# Altium PCB simplemesh.PcbDoc
Units mm, origin at the board's own origin, x right, y up, seen from the top; angles counter-clockwise.
Board outline 89.28 x 57.53 mm, 2 copper layers (Top Layer, Bottom Layer); 6 components, 0 nets, 61 pads, 0 vias.
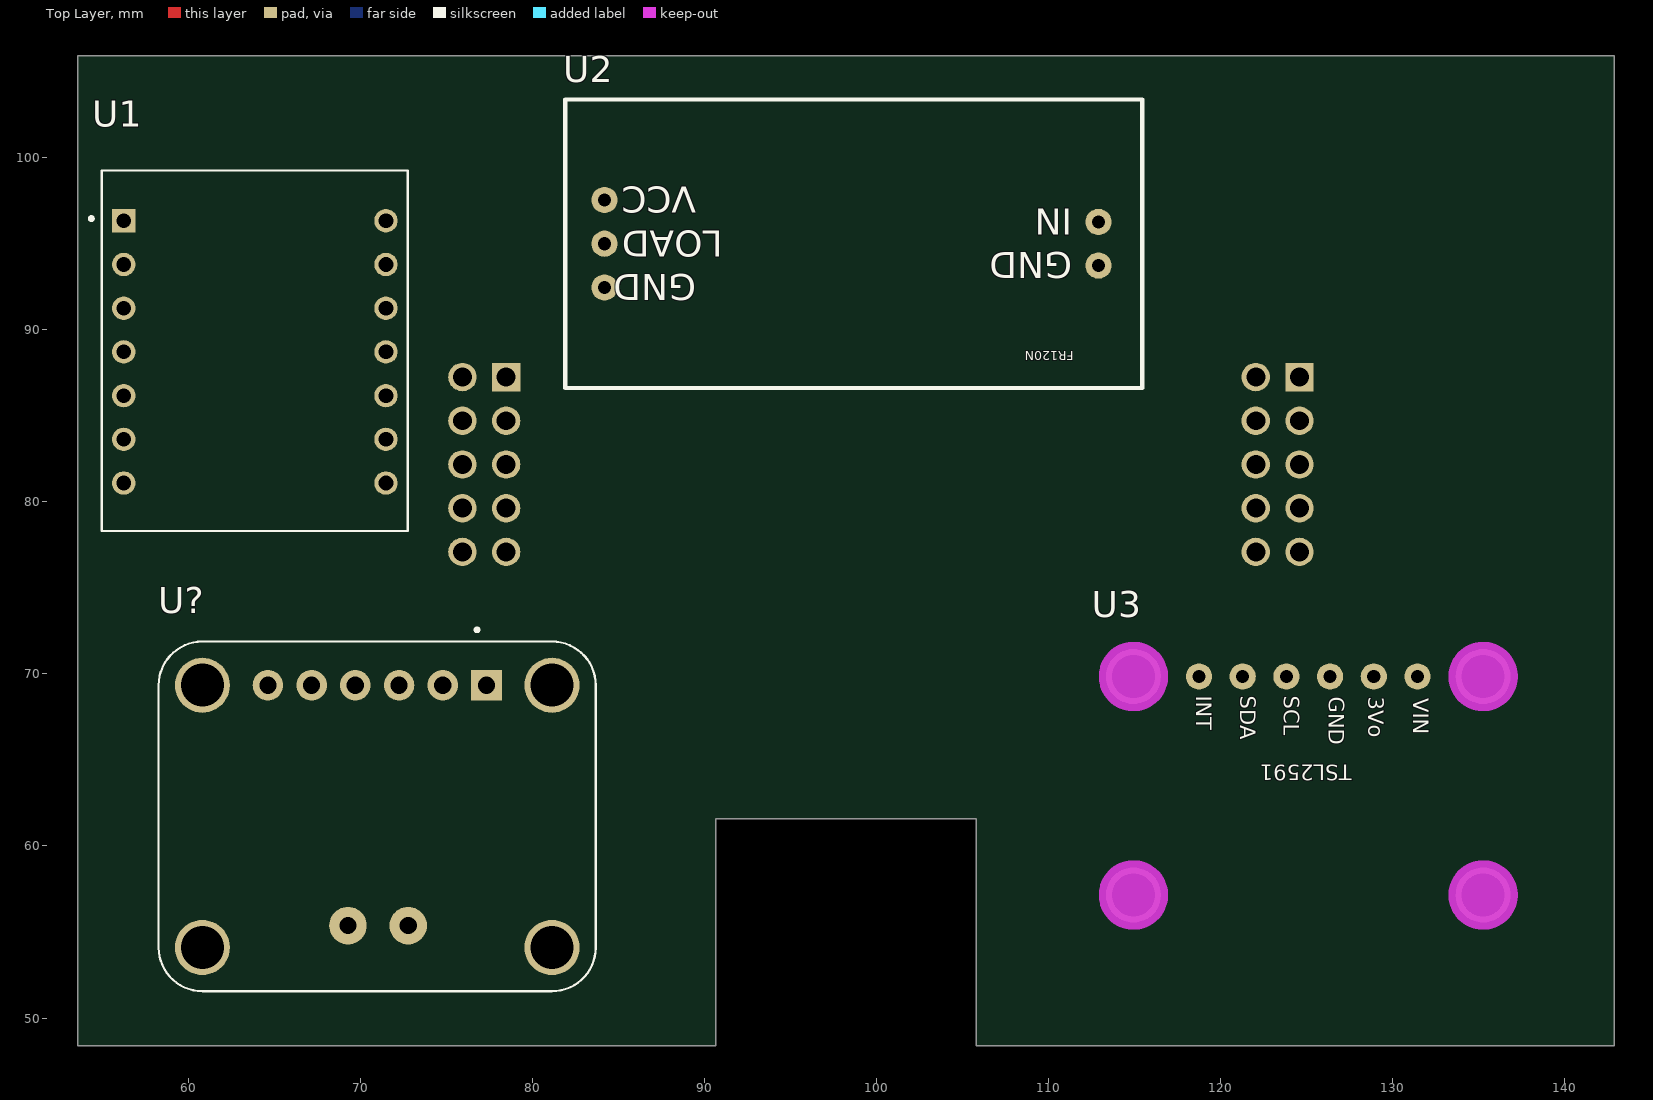
[diagram p0: Top Layer view]
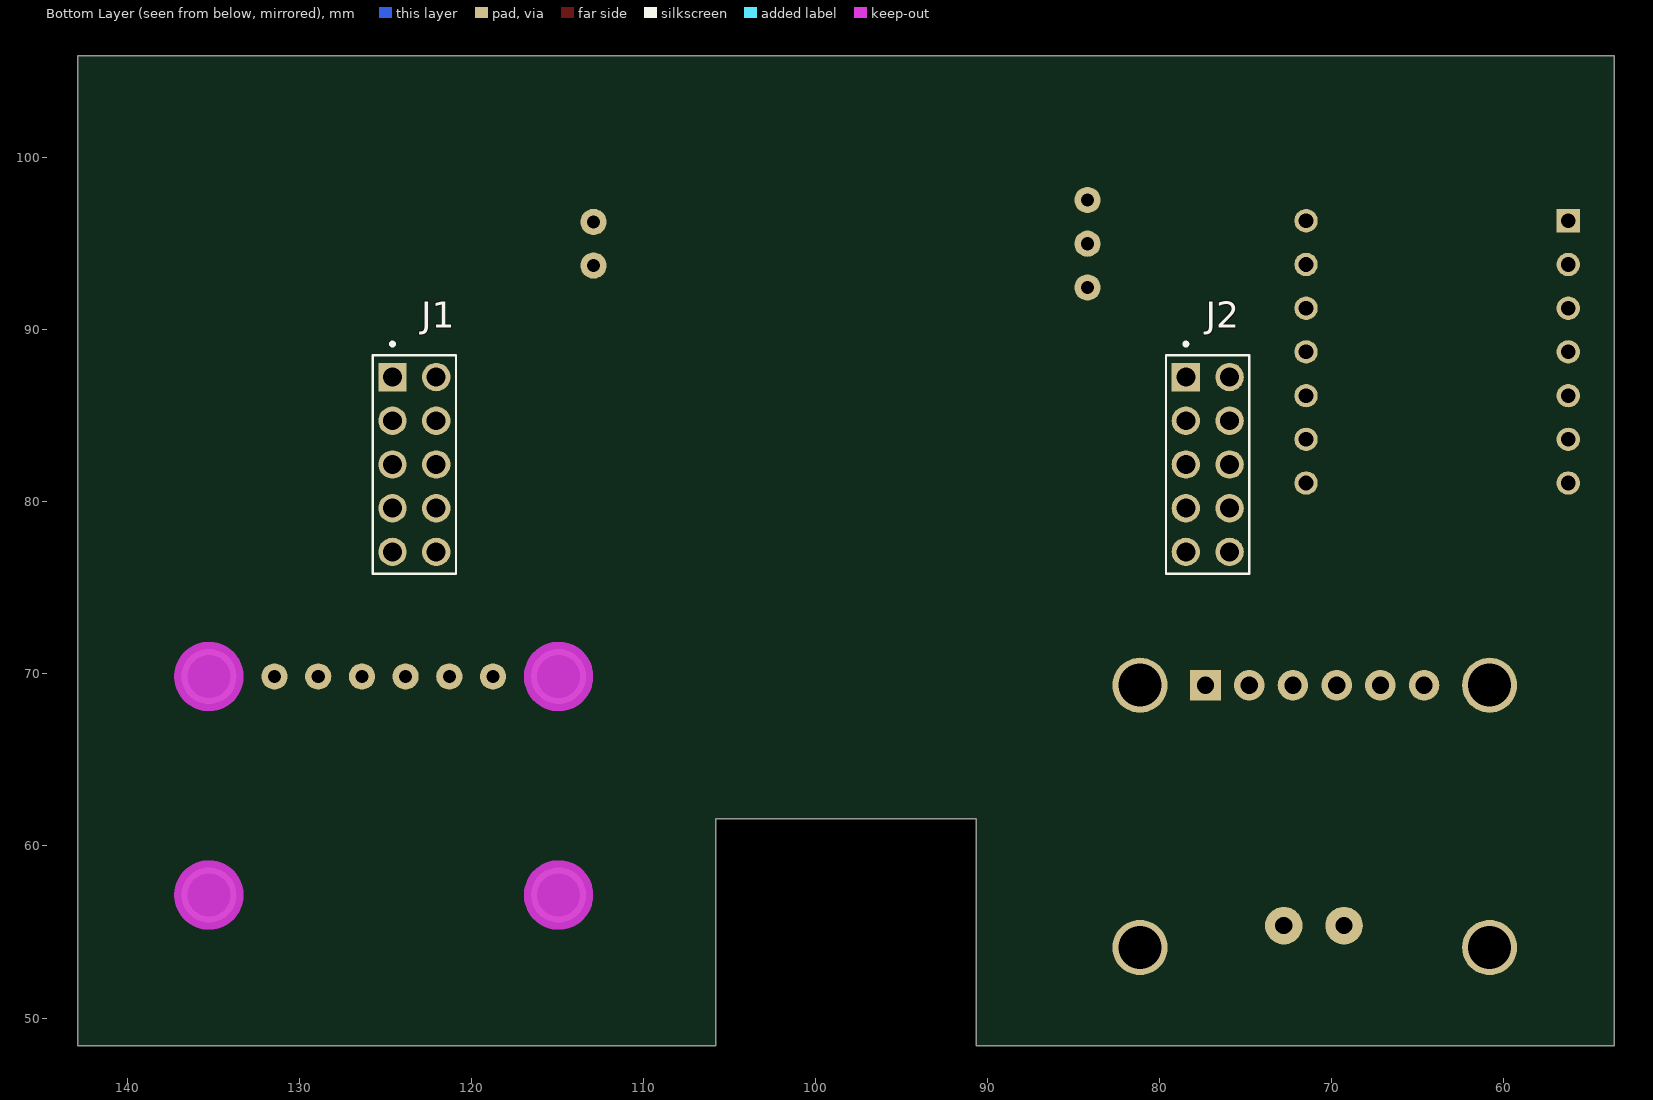
[diagram p1: Bottom Layer view, seen from below]

## Layer stack, top to bottom
Top Solder: solder mask 0.0102, Solder Resist, Dk 3.5
Top Layer: signal copper 0.0356
Dielectric 1: dielectric 0.32, FR-4, Dk 4.8
Bottom Layer: signal copper 0.0356
Bottom Solder: solder mask 0.0102, Solder Resist, Dk 3.5

## Board outline
53.594,48.387 53.594,105.918 142.875,105.918 142.875,48.387 105.791,48.387 105.791,61.595 90.678,61.595 90.678,48.387

## Design rules (kind name [scope] priority, off if disabled: settings)
Clearance [All] p1: gap=0.254 ignorepadtopadclearanceinfootprint=FALSE except(0: Arc-Hole Track-Hole SMDPad-Hole THPad-Hole Via-Hole Fill-Hole Poly-Hole Region-Hole Text-Hole)
PolygonConnect [All] p1: connectstyle=Relief reliefconductorwidth=0.254 reliefentries=4 polygonreliefangle="90 Angle" airgapwidth=0.254
RoomDefinition simplemesh [InComponentClass('simplemesh')] p1: confinementstyle=ConfineIn formatcopy=TRUE lockcomponents=FALSE outline 53.721,48.514 142.748,48.514 142.748,105.791 53.721,105.791
RoutingVias [All] p1: holewidth=0.711 width=1.27 viastyle="Through Hole" minholewidth=0.711 minwidth=1.27 maxholewidth=0.711 maxwidth=1.27
SolderMaskExpansion [All] p1: expansion=0.102 istentingtop=FALSE
Width [All] p1: maxlimit=0.254 minlimit=0.254 preferedwidth=0.254
30 further rules are at their usual default settings.

## Components (designator, comment, footprint, x,y, rotation, side; value= is the part's Value field where it differs from the comment)
J1 "67997410HLF" AMPHENOL_67997-410HLF 123.317,82.169 r270 bottom
J2 "67997410HLF" AMPHENOL_67997-410HLF 77.216,82.169 r270 bottom
U1 "ESP32-C3" ESP32-C3 63.881,88.773 r0 top
U2 "FR120" FR120N_MODULE 98.679,94.996 r180 top
U3 "TSL2591" TSL2591 125.095,69.85 r180 top
U? "INA219" INA219 83.693,71.882 r180 top

## Footprints (in the part's own frame and the unit in brackets; to place one, negate y for a bottom-side part, rotate by r counter-clockwise, add the part's x,y. Pads: shape width x height; smd on the part's side, far side on the other; paste and mask are expansions set on the pad)
AMPHENOL_67997-410HLF [mm]
  rect 1.65x1.65 hole 1.1: 01(-5.08,-1.27)
  round 1.65 hole 1.1: 02(-5.08,1.27) 03(-2.54,-1.27) 04(-2.54,1.27) 05(0,-1.27) 06(0,1.27) 07(2.54,-1.27) 08(2.54,1.27) 09(5.08,-1.27) 10(5.08,1.27)
  silkscreen extent -7.1,-2.41 6.35,2.41, body extent -6.35,-2.42 6.35,2.41, height 8.38
ESP32-C3 [mm]
  rect 1.358x1.358 hole 0.85: 1(-7.62,7.556)
  round 1.358 hole 0.85: 2(-7.62,5.016) 3(-7.62,2.476) 4(-7.62,-0.064) 5(-7.62,-2.603) 6(-7.62,-5.143) 7(-7.62,-7.683) 8(7.62,-7.683) 9(7.62,-5.143) 10(7.62,-2.603) 11(7.62,-0.064) 12(7.62,2.476) 13(7.62,5.016) 14(7.62,7.556)
  silkscreen extent -9.6,-10.48 8.89,10.48, body extent -8.89,-12 8.89,10.46, height 4.21
FR120N_MODULE [mil]
  round 60 hole 30: 1(-560,50) 2(-560,-50) 3(570,100) 4(570,0) 5(570,-100)
  silkscreen extent -660,-330 660,330
INA219 [mm]
  rect 1.778x1.778 / inner round 1.778 / far side rect 1.778x1.778 hole 1: 1(6.35,2.54)
  round 1.778 hole 1: 2(8.89,2.54) 3(11.43,2.54) 4(13.97,2.54) 5(16.51,2.54) 6(19.05,2.54)
  round 3.2 hole 2.5: SH1(2.54,17.78) SH2(22.86,17.78) SH3(2.54,2.54) SH4(22.86,2.54)
  round 2.184 hole 1: VIN+(14.4,16.51) VIN-(10.9,16.51)
  silkscreen extent 0,-0.78 25.4,20.32, body extent 0,0 25.4,20.32, height 4.47
TSL2591 [mil]
  round 60 hole 30: 1(-250,0) 2(-150,0) 3(-50,0) 4(50,0) 5(150,0) 6(250,0)
  round 125.98 hole 98.43: P$1(-400,500) P$1(-400,0) P$1(400,500) P$1(400,0)
  Top Layer keep-out circle w80: c400,500 r39.37
  Top Layer keep-out circle w80: c400,500 r39.37
  Top Layer keep-out circle w80: c-400,500 r39.37
  Top Layer keep-out circle w80: c-400,500 r39.37
  Top Layer keep-out circle w80: c400,0 r39.37
  Top Layer keep-out circle w80: c400,0 r39.37
  Top Layer keep-out circle w80: c-400,0 r39.37
  Top Layer keep-out circle w80: c-400,0 r39.37
  Bottom Layer keep-out circle w80: c400,500 r39.37
  Bottom Layer keep-out circle w80: c400,500 r39.37
  Bottom Layer keep-out circle w80: c-400,500 r39.37
  Bottom Layer keep-out circle w80: c-400,500 r39.37
  Bottom Layer keep-out circle w80: c400,0 r39.37
  Bottom Layer keep-out circle w80: c400,0 r39.37
  Bottom Layer keep-out circle w80: c-400,0 r39.37
  Bottom Layer keep-out circle w80: c-400,0 r39.37
  body extent -500,-100 500,600, height 165

## Part data
J1 J2: "Board Connector, 66 Contact(s), 2 Row(s), Male, Straight, Solder Terminal", Manufacturer="Amphenol Communications Solutions", Supplier Part Number 1=609-3243-ND, ComponentLink1Description=https://datasheet.octopart.com/67997-410HLF-Amphenol-Communications-Solutions-datasheet-10288749.pdf?src-supplier=Farnell, ComponentLink1URL=https://datasheet.octopart.com/67997-410HLF-Amphenol-Communications-Solutions-datasheet-10288749.pdf?src-supplier=Farnell, ComponentLink2Description=https://datasheet.octopart.com/67997-410HLF-Areva-datasheet-15888151.pdf?src-supplier=Element14, ComponentLink2URL=https://datasheet.octopart.com/67997-410HLF-Areva-datasheet-15888151.pdf?src-supplier=Element14, ComponentLink3Description=https://datasheet.octopart.com/67997-410HLF-Amphenol-Communications-Solutions-datasheet-36854132.pdf?src-supplier=Electro+Sonic, ComponentLink3URL=https://datasheet.octopart.com/67997-410HLF-Amphenol-Communications-Solutions-datasheet-36854132.pdf?src-supplier=Electro+Sonic, Manufacturer Part Number=67997410HLF, Pricing 1="1=0.28, 10=0.241, 100=0.2048, 500=0.18272, 1000=0.17399, 5000=0.1553, 10000=0.14789 (USD)", RoHS=No, Stock 1=5093, Supplier 1=Digikey
U2: library part FR120N_Module
U?: Package=None, Availability=Unavailable, MF="Adafruit Industries", MP=904, Price=None
U1: Check_prices=https://www.snapeda.com/parts/113991054/Seeed+Studio/view-part/?ref=eda, SnapEDA_Link=https://www.snapeda.com/parts/113991054/Seeed+Studio/view-part/?ref=snap

## Nets (pads, with @x,y where several pads share a name; then routed paths per layer and width w, separated by ;. In a path a pad name is that pad's centre, name@x,y a point inside that pad or via, vN(x,y) a via of type N, cw(c..) or ccw(c..) an arc to the next point about the centre after c; other vN are vias at no path point)
pads on no net: J1.01 J1.02 J1.03 J1.04 J1.05 J1.06 J1.07 J1.08 J1.09 J1.10 J2.01 J2.02 J2.03 J2.04 J2.05 J2.06 J2.07 J2.08 J2.09 J2.10 U1.1 U1.2 U1.3 U1.4 U1.5 U1.6 U1.7 U1.8 U1.9 U1.10 U1.11 U1.12 U1.13 U1.14 U2.1 U2.2 U2.3 U2.4 U2.5 U3.1 U3.2 U3.3 U3.4 U3.5 U3.6 U3.P$1 U?.1 U?.2 U?.3 U?.4 U?.5 U?.6 U?.SH1 U?.SH2 U?.SH3 U?.SH4 U?.VIN+ U?.VIN-

## Silkscreen, mask and mechanical layers (free items; w line width, h text height)
Mechanical 1:
  the board outline again, w0.254

## Text inside footprints (layer, text, board x,y; h text height)
U2: Top Overlay "GND" at 111.379,94.488 h1.52 r180; Top Overlay "IN" at 111.379,97.028 h1.52 r180; Top Overlay "GND" at 89.535,93.218 h1.52 r180; Top Overlay "LOAD" at 91.059,95.758 h1.52 r180; Top Overlay "VCC" at 89.535,98.298 h1.52 r180; Top Overlay "FR120N" at 111.479,88.746 h0.52 r180
U3: Top Overlay "INT" at 118.287,68.728 h1.52 r270; Top Overlay "SDA" at 120.844,68.728 h1.52 r270; Top Overlay "SCL" at 123.384,68.728 h1.52 r270; Top Overlay "GND" at 125.996,68.672 h1.52 r270; Top Overlay "3Vo" at 128.282,68.672 h1.52 r270; Top Overlay "VIN" at 130.92,68.579 h1.52 r270